# Altium PCB adc3.PcbDoc
Units mil, origin at the board's own origin, x right, y up, seen from the top; angles counter-clockwise.
Board outline 6000 x 4000 mil, 2 copper layers (Top Layer, Bottom Layer); 27 components, 18 nets, 88 pads, 15 vias.
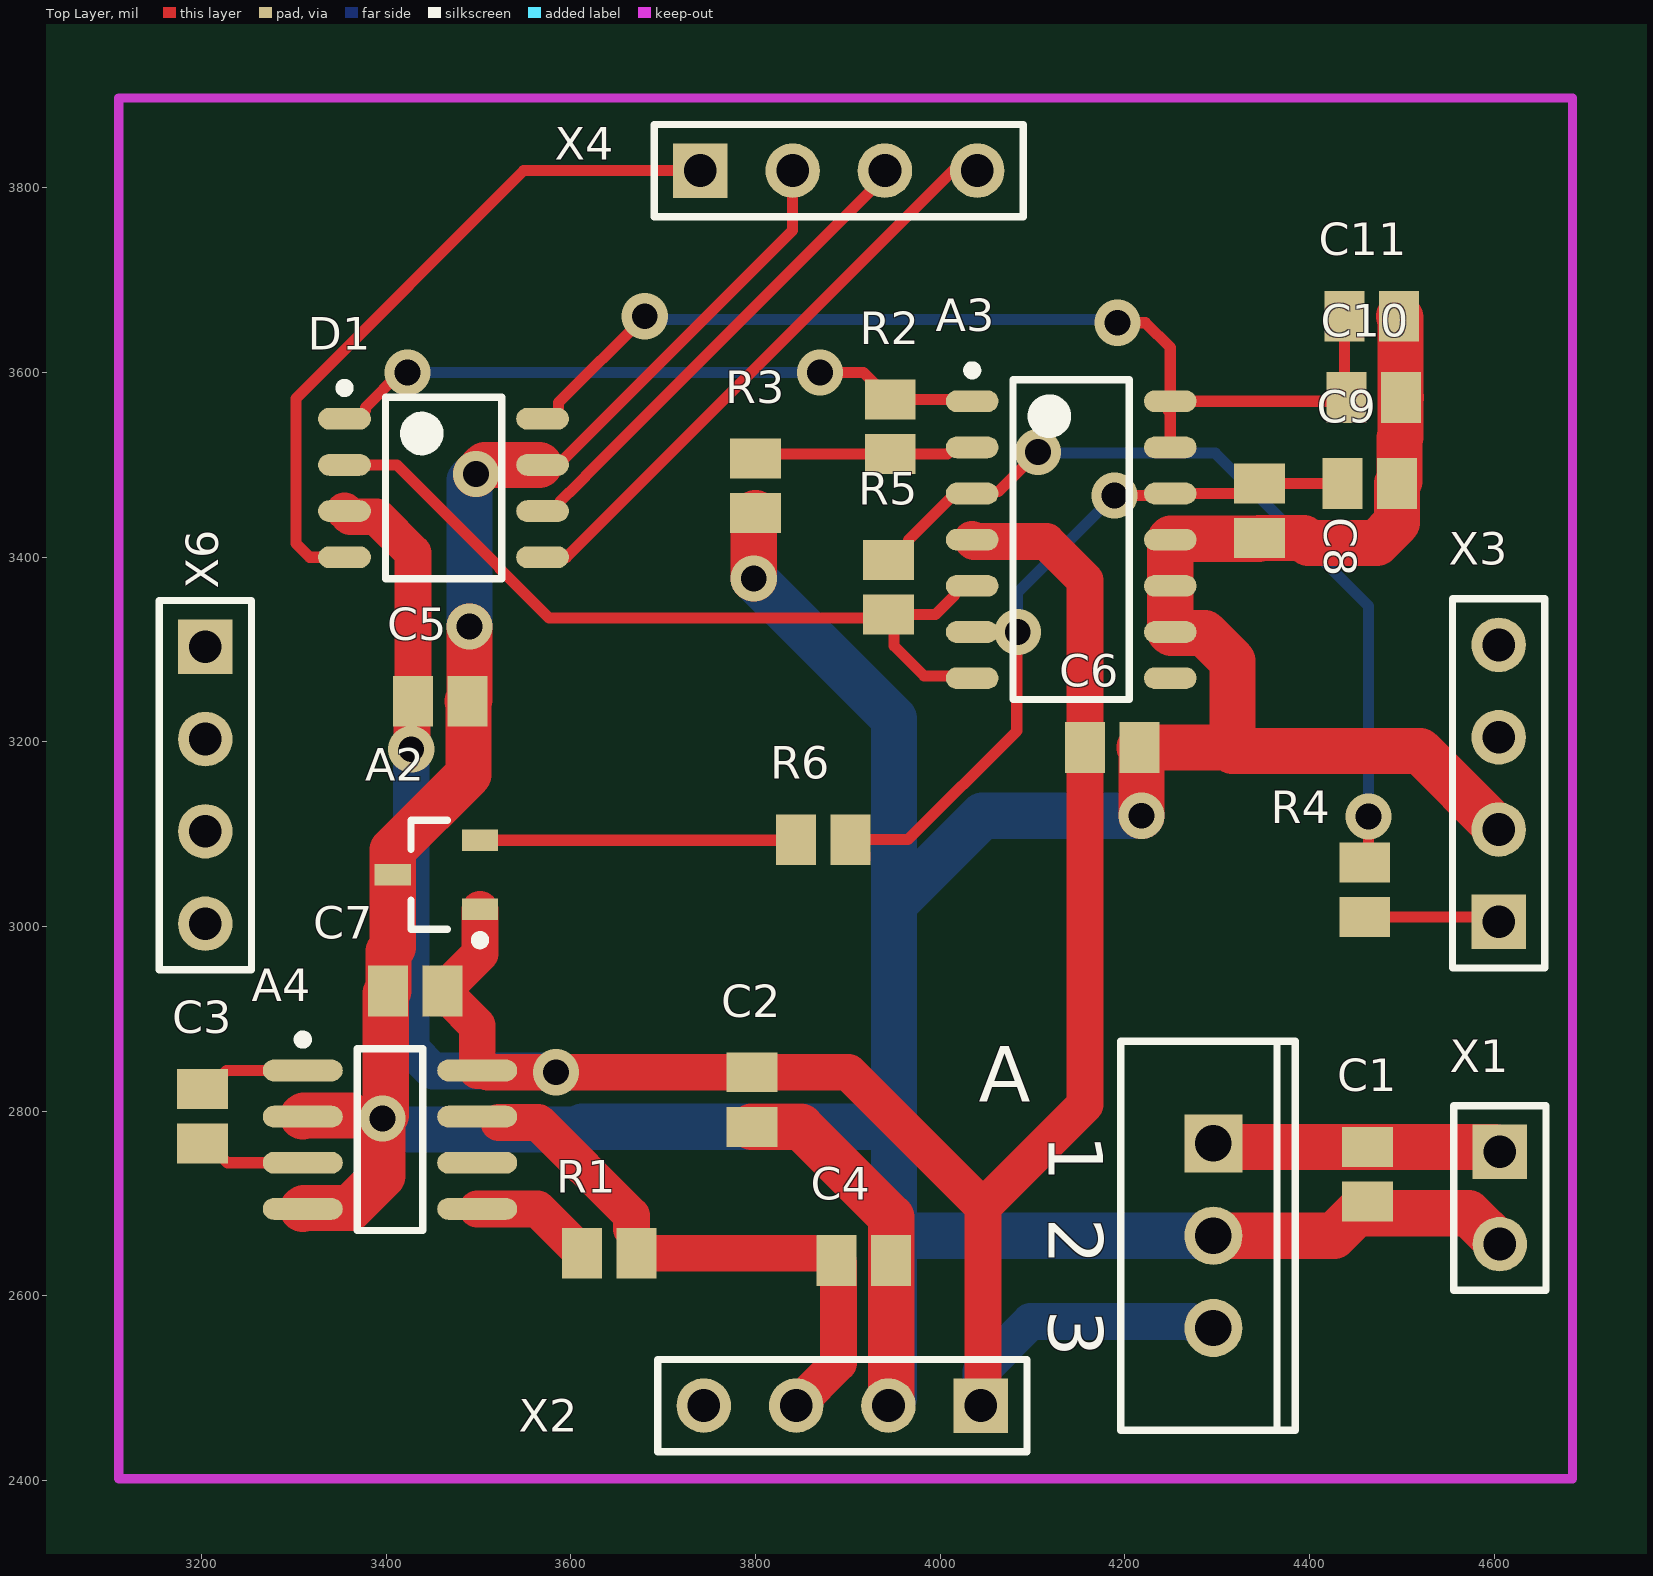
[diagram p0: Top Layer view]
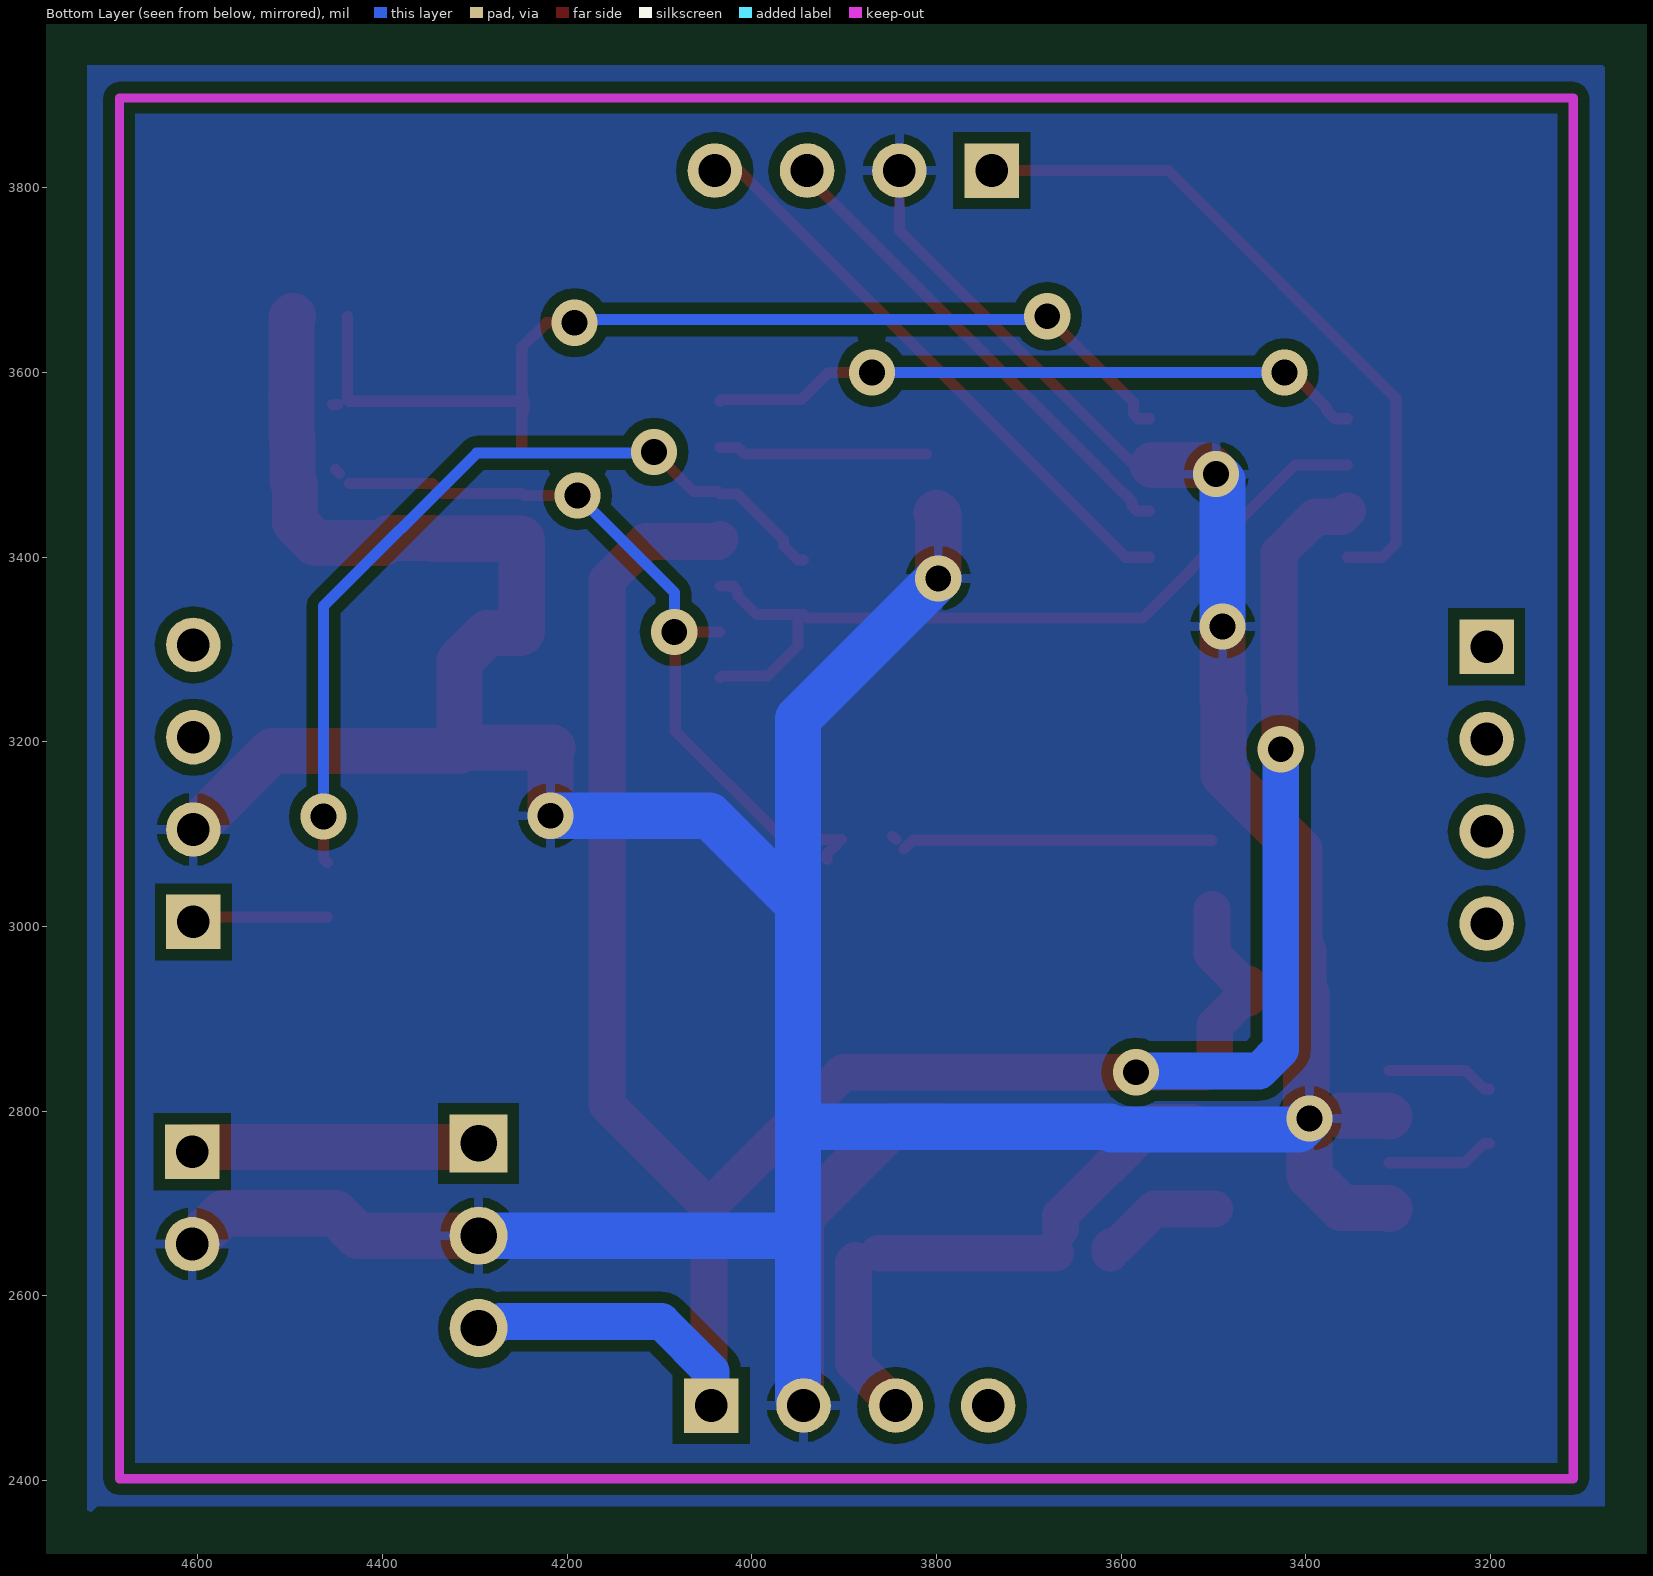
[diagram p1: Bottom Layer view, seen from below]

## Layer stack, top to bottom
Top Solder: solder mask 0.4, Solder Resist, Dk 3.5
Top Layer: signal copper 1.4
Dielectric 1: dielectric 12.6, FR-4, Dk 4.8
Bottom Layer: signal copper 1.4
Bottom Solder: solder mask 0.4, Solder Resist, Dk 3.5

## Board outline
1000,1000 7000,1000 7000,5000 1000,5000

## Design rules (kind name [scope] priority, off if disabled: settings)
Clearance [All] p1: gap=12 ignorepadtopadclearanceinfootprint=FALSE
HoleSize [All] p1: absolutevalues=TRUE maxlimit=125.98 minlimit=1 maxpercent=80.000 minpercent=20.000
MinimumSolderMaskSliver [All] p1: minsoldermaskwidth=2
PolygonConnect [All] p1: connectstyle=Relief reliefconductorwidth=10 reliefentries=4 polygonreliefangle="90 Angle" airgapwidth=10
RoutingVias [All] p1: holewidth=28 width=50 viastyle="Through Hole" minholewidth=28 minwidth=50 maxholewidth=28 maxwidth=50
SilkToSolderMaskClearance [IsPad] p1: minsilkscreentomaskgap=2 clearancetoexposedcopper=TRUE
SolderMaskExpansion [All] p1: expansion=4 istentingtop=FALSE
Width [All] p1: maxlimit=60 minlimit=12 preferedwidth=12 minimp=50.000000 maximp=50.000000 favimp=50.000000
27 further rules are at their usual default settings.

## Components (designator, comment, footprint, x,y, rotation, side; value= is the part's Value field where it differs from the comment)
A "LM7805" TO-220-AB 4296,2665 r270 top
A2 "REF3025" SOT95P245X112-3N 3454.24,3056 r180 top
A3 "OPA4350" SOIC127P600X175-14N 4142,3419 r0 top
A4 "ADP3605" SO8_N 3404,2769 r0 top
C1 "330n" C0805 4463,2731.53 r90 top value=100pF
C2 "100n" C0805 3796,2812.53 r90 top value=100pF
C3 "10u" C0805 3201,2794.53 r270 top
C4 "10u" C0805 3917.47,2638 r180 top
C5 "100n" C0805 3458.47,3244 r180 top value=100pF
C6 "100n" C0805 4186.47,3194 r180 top value=100pF
C7 "100n" C0805 3431.53,2930 r0 top value=100pF
C8 "10u" C0805 4346,3450.47 r270 top
C9 "100n" C0805 4465.53,3480 r180 top value=100pF
C10 "10u" C0805 4469.53,3573 r0 top
C11 "100n" C0805 4467.53,3661 r180 top value=100pF
D1 "ADS1251" SOIC127P600X175-8N 3462,3475 r0 top
R1 "31k6" C0805 3641.47,2646 r0 top value=1K
R2 "5k" C0805 3946,3541.53 r270 top value=1K
R3 "10k" C0805 3800,3477.47 r270 top value=1K
R4 "20k" C0805 4460,3040 r270 top value=1K
R5 "10k" C0805 3944,3367.53 r270 top value=1K
R6 "10k" C0805 3873.47,3094 r180 top value=1K
X1 "napajanje" HDR1X2 4606.3,2755.91 r270 top
X2 "Input" HDR1X4 4044,2481 r180 top
X3 "Input" HDR1X4 4605,3005 r90 top
X4 "Input/output" HDR1X4 3740.16,3818.9 r0 top
X6 "Input" HDR1X4 3204,3303 r270 top

## Footprints (in the part's own frame and the unit in brackets; to place one, negate y for a bottom-side part, rotate by r counter-clockwise, add the part's x,y. Pads: shape width x height; smd on the part's side, far side on the other; paste and mask are expansions set on the pad)
C0805 [mm] "Chip Capacitor, Body 2.0x1.3mm, IPC High Density"
  rect 1.1x1.4 smd: 1(-0.75,0) 2(0.75,0)
  body extent -1.1,-0.72 1.1,0.72, height 1.4
HDR1X2 [mm] "Connector; Header; 2 Position"
  rect 1.5x1.5 hole 0.9: 1(0,0)
  round 1.5 hole 0.9: 2(2.54,0)
  silkscreen extent -1.27,-1.27 3.81,1.27
HDR1X4 [mm] "Connector; Header; 4 Position"
  rect 1.5x1.5 hole 0.9: 1(0,0)
  round 1.5 hole 0.9: 2(2.54,0) 3(5.08,0) 4(7.62,0)
  silkscreen extent -1.27,-1.27 8.89,1.27
SO8_N [mm] "SOIC, 8-Leads, Body 4.9x3.9mm, Pitch 1.27mm, IPC Medium Density"
  oval 2.2x0.6 smd: 1(-2.4,1.905) 2(-2.4,0.635) 3(-2.4,-0.635) 4(-2.4,-1.905) 5(2.4,-1.905) 6(2.4,-0.635) 7(2.4,0.635) 8(2.4,1.905)
  silkscreen extent -2.52,-2.5 0.9,2.88, body extent -2,-2.5 2,2.5, height 1.75
SOIC127P600X175-8N [mm] "SOIC, 8-Leads, Body 4,90x3,90mm, Pitch 1,27mm, IPC Medium Density"
  oval 1.45x0.6 smd: 1(-2.725,1.905) 2(-2.725,0.635) 3(-2.725,-0.635) 4(-2.725,-1.905) 5(2.725,-1.905) 6(2.725,-0.635) 7(2.725,0.635) 8(2.725,1.905)
  silkscreen extent -2.85,-2.5 1.6,2.88, body extent -2,-2.5 2,2.5, height 1.75
SOIC127P600X175-14N [mm] "SOIC, 14-Leads, Body 8,65x3,90mm, Pitch 1,27mm, IPC Medium Density"
  oval 1.45x0.6 smd: 1(-2.725,3.81) 2(-2.725,2.54) 3(-2.725,1.27) 4(-2.725,0) 5(-2.725,-1.27) 6(-2.725,-2.54) 7(-2.725,-3.81) 8(2.725,-3.81) 9(2.725,-2.54) 10(2.725,-1.27) 11(2.725,0) 12(2.725,1.27) 13(2.725,2.54) 14(2.725,3.81)
  silkscreen extent -2.85,-4.4 1.6,4.78, body extent -2,-4.4 2,4.4, height 1.75
SOT95P245X112-3N [mm] "SOT23, 3-Leads, Body 2,92x2,45mm, Pitch 0,95mm, IPC Medium Density"
  rect 1x0.6 smd: 1(-1.2,0.95) 2(-1.2,-0.95) 3(1.2,0)
  silkscreen extent -1.33,-1.5 0.7,1.92, body extent -0.7,-1.52 0.7,1.52, height 1.12
TO-220-AB [mm] "TO, Thru-Hole, Vertical, Heatsink Mounted; 3 In-Line Leads; Pitch 2.54 mm"
  rect 1.6x1.6 hole 1: 1(-2.54,0)
  round 1.6 hole 1: 2(0,0) 3(2.54,0)
  silkscreen extent -5.35,-2.55 5.35,2.25

## Part data
A2: library part REF3040, Cijena [L]=1,246, Kat.broj=461-9541
C1 C2 C5 C6 C7 C9 C11: library part Cap, "Capacitor", LatestRevisionDate=17-Jul-2002, LatestRevisionNote="Re-released for DXP Platform.", PackageDescription="Radial Cap, Thru-Hole; 2 Leads; 0.3 in Pin Spacing", PackageReference=RAD-0.3, Published=8-Jun-2000, Publisher="Altium Limited"
  C1: Cijena [L]=0.172, Kat.broj=915-9467
  C2 C5 C6 C7 C9 C11: Cijena [L]=0.12, Kat.broj=264-4416
C3 C4 C8 C10: library part elko2
R1 R2 R3 R4 R5 R6: library part Res2, "Resistor", LatestRevisionDate=17-Jul-2002, LatestRevisionNote="Re-released for DXP Platform.", PackageDescription="Axial Device, Thru-Hole; 2 Leads; 0.4 in Pin Spacing", PackageReference=AXIAL-0.4, Published=8-Jun-2000, Publisher="Altium Limited"
  R1: Cijena [L]=0.58, Kat.broj=215-4086
  R2: Cijena [L]=0.268, Kat.broj=708-6339
  R3 R5 R6: Cijena [L]=0.47, Kat.broj=565-948
  R4: Cijena [L]=0.538, Kat.broj=125-1185
X1: library part "Header 2H", "Header, 2-Pin, Right Angle", LatestRevisionDate=17-Jul-2002, LatestRevisionNote="Re-released for DXP Platform.", Publisher="Altium Limited"
X2 X3 X4 X6: library part "Header 4H", "Header, 4-Pin, Right Angle", LatestRevisionDate=17-Jul-2002, LatestRevisionNote="Re-released for DXP Platform.", Publisher="Altium Limited"
A4: Cijena [L]=2.255, Kat.broj=159-7701
D1: Cijena [L]=10.35, Kat.broj=662-0023

## Via types
v1: diameter 50, hole 28, Top Layer to Bottom Layer, 15 vias

## Nets (pads, with @x,y where several pads share a name; then routed paths per layer and width w, separated by ;. In a path a pad name is that pad's centre, name@x,y a point inside that pad or via, vN(x,y) a via of type N, cw(c..) or ccw(c..) an arc to the next point about the centre after c; other vN are vias at no path point)
AGND: A2.3 A3.9 A3.10 A3.11 A4.2 A4.4 A.2 C1.1 C2.1 C4.1 C5.1 C6.1 C7.1 C8.2 C9.1 C10.2 C11.1 D1.7 R3.2 X1.2 X2.2 X3.2 X4.2 | length 5711.2
  Top Layer w12: D1.7 3586.02,3500 3840.16,3754.14 X4.2
  Top Layer w50: A4.4 3310.7,2695.19 3361.23,2695.19 3396,2729.96 v1(3396,2792) 3399.44,2795.44 3399.44,2927.44 C7.1 3402.4,2930.4 3402.4,2972.89 3407,2977.48 A2.3 3407,3082.74 3489,3164.74 3489,3243 C5.1 3490,3246 v1(3490,3325) ; A4.2 3310.7,2795.19 3361.23,2795.19 ; v1(3497,3490) 3507,3500 D1.7@3565.74,3500 ; C2.1 3849,2783 3947,2685 C4.1 3947,2486.45 3944,2483.45 X2.2 ; v1(3798,3377) 3798,3445.94 R3.2 ; v1(4218,3120) 4218,3192 C6.1 4313,3194 4316.6,3190.4 ; A.2 4426.79,2665 4451.17,2689.38 4572.48,2689.38 4605.95,2655.91 X1.2 ; C11.1 4498.65,3659.4 4498.65,3573.4 C10.2 4498.65,3572.6 4498.65,3530.11 4497.61,3529.08 4497.61,3482.56 C9.1 4495.06,3437.52 4472.98,3415.44 4399.02,3415.44 4393.52,3420.94 C8.2 4345.03,3419.97 4250.26,3419.97 A3.11 A3.10 A3.9 4250.47,3317.81 4286.23,3317.81 4316.6,3287.45 4316.6,3190.4 ; X3.2 4520,3190 4317,3190 4316.6,3190.4 ; X1.2@4606.3,2652.7 X1.2@4606.3,2653.46
  Bottom Layer w50: v1(3396,2792) 3407.94,2780.06 3609.68,2780.06 3612.63,2783 3950,2783 ; v1(3490,3325) 3490,3483 v1(3497,3490) ; v1(3798,3377) 3950,3225 3950,3024 ; X2.2 3944,2483.45 3950,2489.45 3950,2665 ; v1(4218,3120) 4046,3120 3950,3024 ; A.2 3950,2665 ; 3950,2665 3950,2783 ; 3950,2783 3950,3024
NetA2_2: A2.2 R6.2 | length 342.2
  Top Layer w12: A2.2 3825.54,3093.4 R6.2@3834.94,3084 ; R6.2 R6.2@3847.35,3097.4
NetA3_1: A3.1 D1.1 R2.1 | length 715.5
  Top Layer w12: D1.1 3368.3,3550 3377.26,3558.96 3377.26,3562.26 3415,3600 v1(3423,3600) ; v1(3870,3600) 3917.06,3600 R2.1 4032.66,3571.06 A3.1
  Bottom Layer w12: v1(3423,3600) v1(3870,3600)
NetA3_2: A3.2 R2.2 R3.1 | length 226.6
  Top Layer w12: R3.1@3811,3512 R2.2 4007.84,3512 4014.84,3519 A3.2
NetA3_3: A3.3 R4.1 R5.1 | length 919.4
  Top Layer w12: R5.1 3949.91,3397.06 3965.56,3412.71 3965.56,3418.61 4015.36,3468.41 A3.3@4034.13,3468.41 ; A3.3 4036.94,3471.22 4063.22,3471.22 v1(4106,3514) ; R4.1 4464,3073.53 v1(4464,3119)
  Bottom Layer w12: v1(4106,3514) 4107,3513 4298,3513 4464,3347 v1(4464,3119)
NetA3_5: A3.5 A3.7 D1.2 R5.2 | length 900.3
  Top Layer w12: D1.2 3411.81,3500 3522.74,3389.07 3522.74,3387.65 3576.39,3334 3940,3334 R5.2 R5.2@3949.91,3338 ; A3.7 4032.49,3271.22 3982.78,3271.22 3949.91,3304.09 R5.2@3949.91,3338 ; A3.5 4021.13,3369 4015.76,3363.63 4015.76,3358.62 4005.96,3348.81 4005.64,3348.81 3994.83,3338 R5.2@3949.91,3338
NetA3_6: A3.6 A3.12 C8.1 C9.2 R6.1 | length 854.7
  Top Layer w12: R6.1 3965,3094 4083,3212 4083,3318 v1(4084,3319) A3.6 ; R6.1@3909,3088 3918.65,3078.35 R6.1@3918.65,3072.44 ; v1(4189,3466.78) 4247.06,3466.78 A3.12 4335,3469 C8.1 C9.2 ; C9.2@4446.89,3490.89 C9.2@4451.03,3495.03
  Bottom Layer w12: v1(4084,3319) 4084,3361.78 v1(4189,3466.78)
NetA3_13: A3.13 A3.14 C10.1 C11.2 D1.8 | length 1159.2
  Top Layer w12: D1.8 3581.36,3550 3586.73,3555.37 3586.73,3567.45 3680,3660.72 v1(3680,3661) ; v1(4192,3654) 4222.28,3654 4249.28,3627 A3.14 ; A3.13 A3.14@4249.28,3561.28 ; C11.2 4438,3571 4436,3569 A3.14 ; C10.1@4448.44,3565.44 C10.1@4454.35,3565.44 ; A3.14@4249.28,3561.28 A3.14 ; A3.14@4249.28,3561.28 4247.06,3559.06 4247.06,3571.22 A3.14
  Bottom Layer w12: v1(3680,3661) 3683.5,3657.5 4188.5,3657.5 v1(4192,3654)
NetA4_1: A4.1 C3.1 | length 116.8
  Top Layer w12: C3.1 3206.91,2824.06 3226.85,2844 A4.1
NetA4_3: A4.3 C3.2 | length 117.2
  Top Layer w12: C3.2 3206.91,2765 3227.91,2744 A4.3
NetA4_5: A4.5 R1.1 | length 136.8
  Top Layer w40: A4.5 3563.94,2694 3604.39,2653.56 3610.29,2653.56 3611.94,2651.91 R1.1
NetA_1: A.1 C1.2 X1.1 | length 314.1
  Top Layer w50: A.1 4299.94,2761.06 C1.2 4601.15,2761.06 X1.1
NetD1_4: D1.4 X4.1 | length 756.3
  Top Layer w12: D1.4 3317.03,3400 3302,3415.03 3302,3572 3548.9,3818.9 X4.1
NetD1_5: D1.5 X4.4 | length 644.4
  Top Layer w12: D1.5 3595,3400 4013.9,3818.9 X4.4
NetD1_6: D1.6 X4.3 | length 530.7
  Top Layer w12: D1.6 3582.87,3450 3588.24,3455.37 3588.24,3460.38 3598.04,3470.19 3598.36,3470.19 3615.83,3487.65 3615.83,3487.97 3940.16,3812.3 X4.3
NetR4_2: R4.2 X3.1 | length 147.3
  Top Layer w12: R4.2 4599.53,3010.47 X3.1
VCC+: A2.1 A3.4 A4.8 A.3 C2.2 C5.2 C6.2 C7.2 D1.3 X2.1 | length 3017.1
  Top Layer w40: D1.3 3360.91,3443.81 3389.6,3443.81 3428.94,3404.46 C5.2 3427.97,3243.03 3427.97,3192.97 v1(3427,3192) ; A2.1 3501.49,2970.43 3468.61,2937.56 3462.71,2937.56 3461.06,2935.91 C7.2 3461.06,2924.09 3462.71,2922.44 3468.61,2922.44 3498.49,2892.57 A4.8 3507.94,2844 3509.89,2842.06 v1(3584,2842.06) C2.2 3900.81,2842.06 4046.43,2696.43 ; A3.4 4036.72,3417 4115,3417 4156.94,3375.06 C6.2 4156.94,2806.94 4046.43,2696.43 ; X2.1 4046.43,2483.43 4046.43,2696.43
  Bottom Layer w40: v1(3427,3192) 3427,2866.93 3450.43,2843.5 3582.56,2843.5 v1(3584,2842.06) ; X2.1 4044,2518 4098,2572 4272.74,2572 4275.34,2569.4 4291.6,2569.4 A.3
VCC-: A4.7 C4.2 R1.2 X2.3 | length 568.9
  Top Layer w40: A4.7@3521.8,2787.81 3564.6,2787.81 3665.6,2686.81 R1.2@3665.6,2672.33 ; R1.2 3862.86,2646 ; X2.3 3890,2527 3890,2635.94 C4.2
pads on no net: A3.8 A4.6 X2.4 X3.3 X3.4 X6.1 X6.2 X6.3 X6.4

## Polygon pours and split planes (outlines as drawn)
AGND on Top Layer "Top Layer-AGND" (solid, pour order 4): 3281,4046
AGND on Bottom Layer "Bottom Layer-AGND" (solid, pour order 6): 3078,3933 4720,3933 4720,2361 4709,2372 3076,2372 3076,3931

## Keep-outs
Keep-Out Layer:
  lines w10: 3110.24,2401.57 4685.04,2401.57 4685.04,3897.64 3110.24,3897.64 3110.24,2401.57

## Silkscreen, mask and mechanical layers (free items; w line width, h text height)
Mechanical 1:
  lines w10: 3070.87,2362.2 4724.41,2362.2 4724.41,3937.01 3070.87,3937.01 3070.87,2362.2

## Text inside footprints (layer, text, board x,y; h text height)
A: Top Overlay "3" at 4117.85,2584.68 h59.06 r270; Top Overlay "2" at 4117.85,2684.68 h59.06 r270; Top Overlay "1" at 4117.85,2774.84 h59.06 r270